# Altium PCB Lenovo_Scanner t32.PcbDoc
Units mm, origin at the board's own origin, x right, y up, seen from the top; angles counter-clockwise.
Board outline 49.92 x 50.5 mm, 2 copper layers (Top, Bottom); 11 components, 64 nets, 111 pads, 13 vias.
Unrouted connection lines stored in the file: 2.
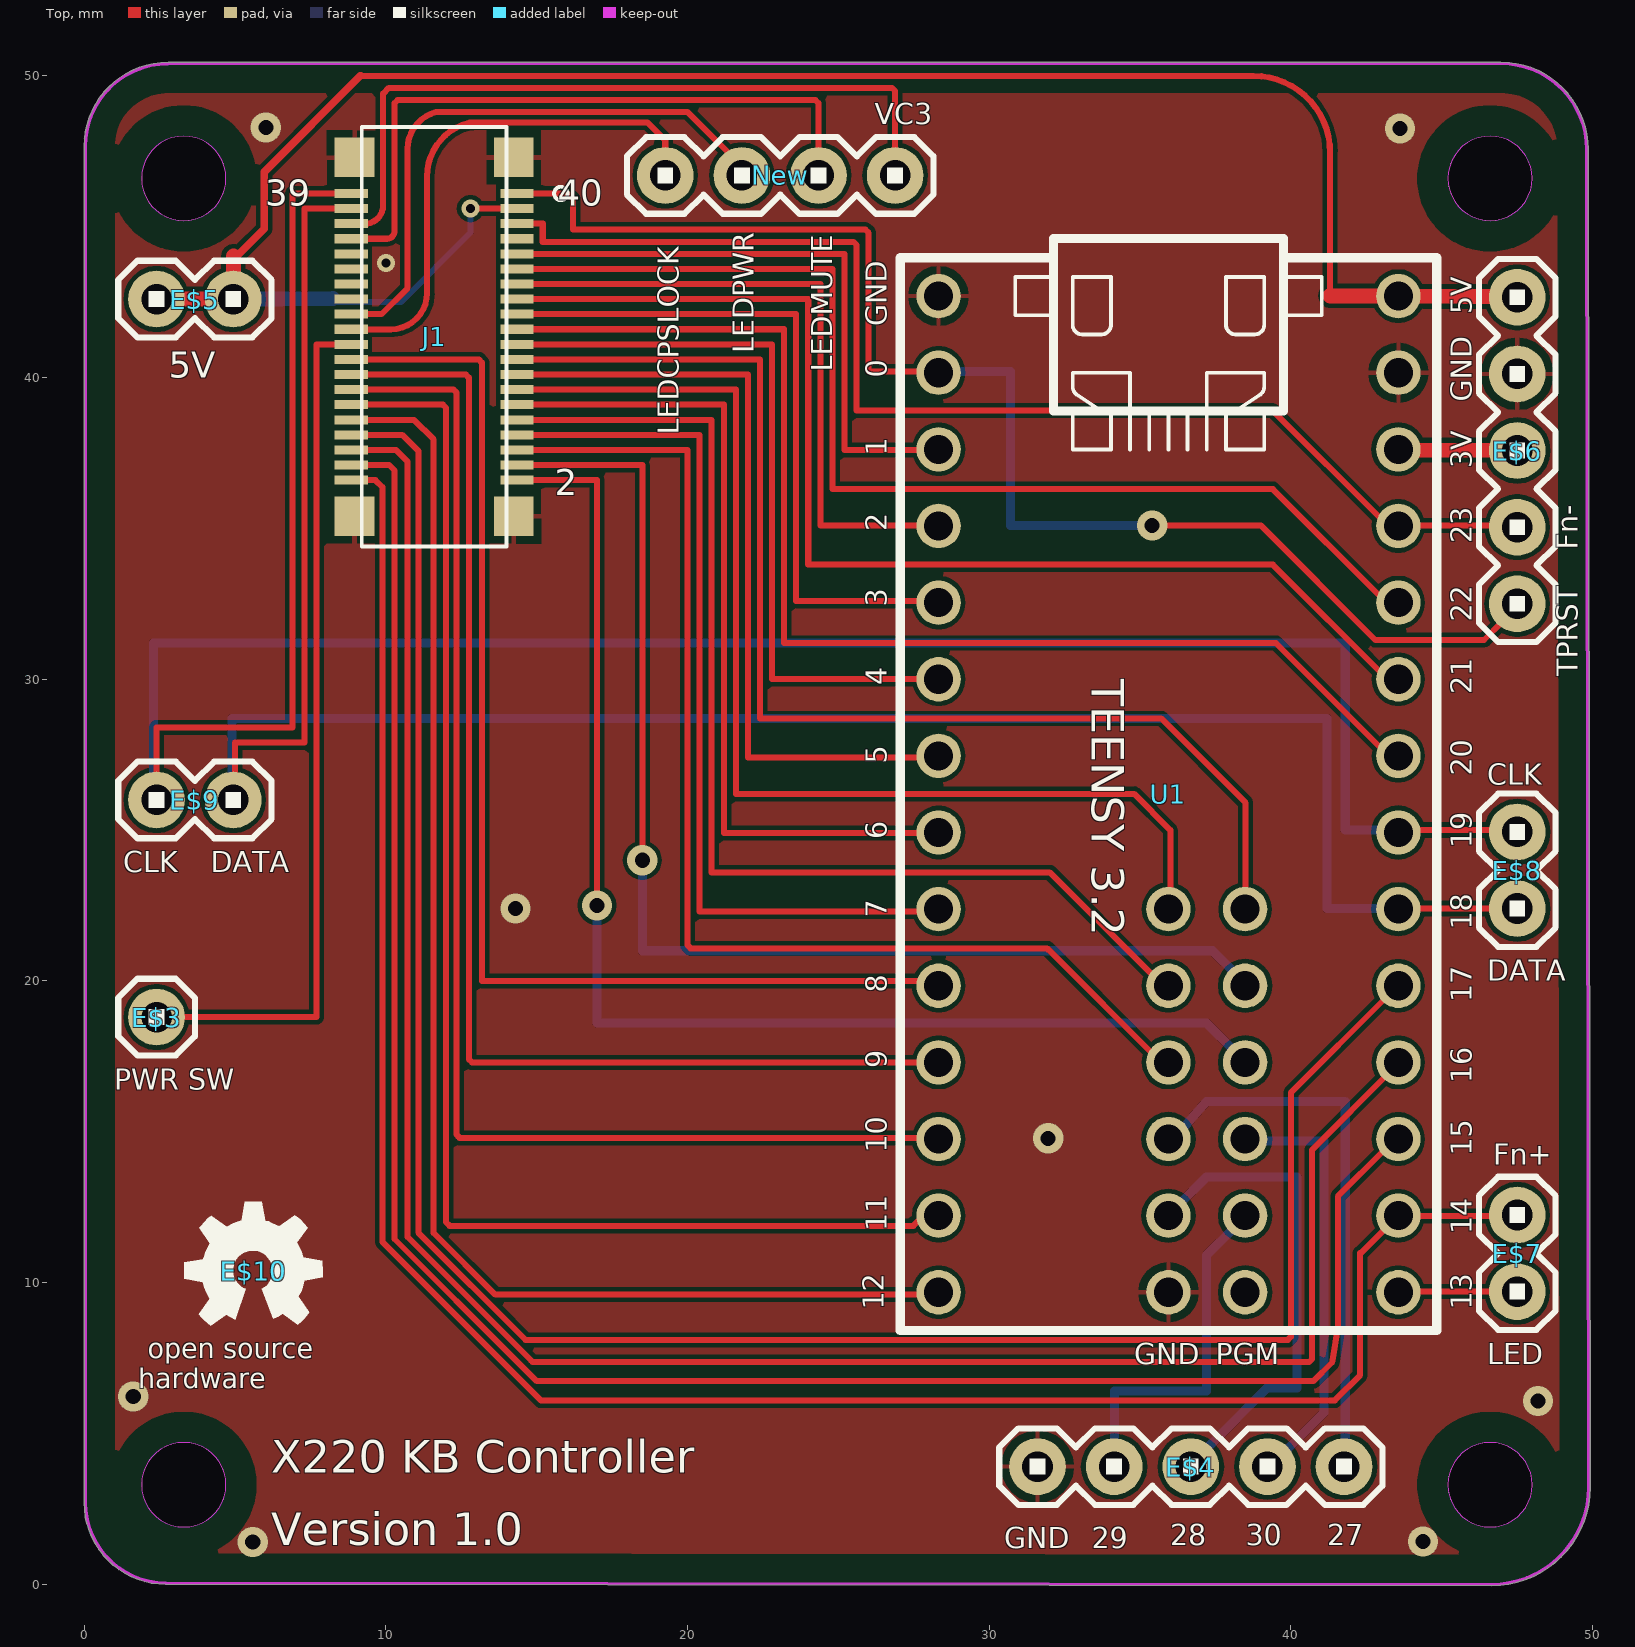
[diagram p0: Top view]
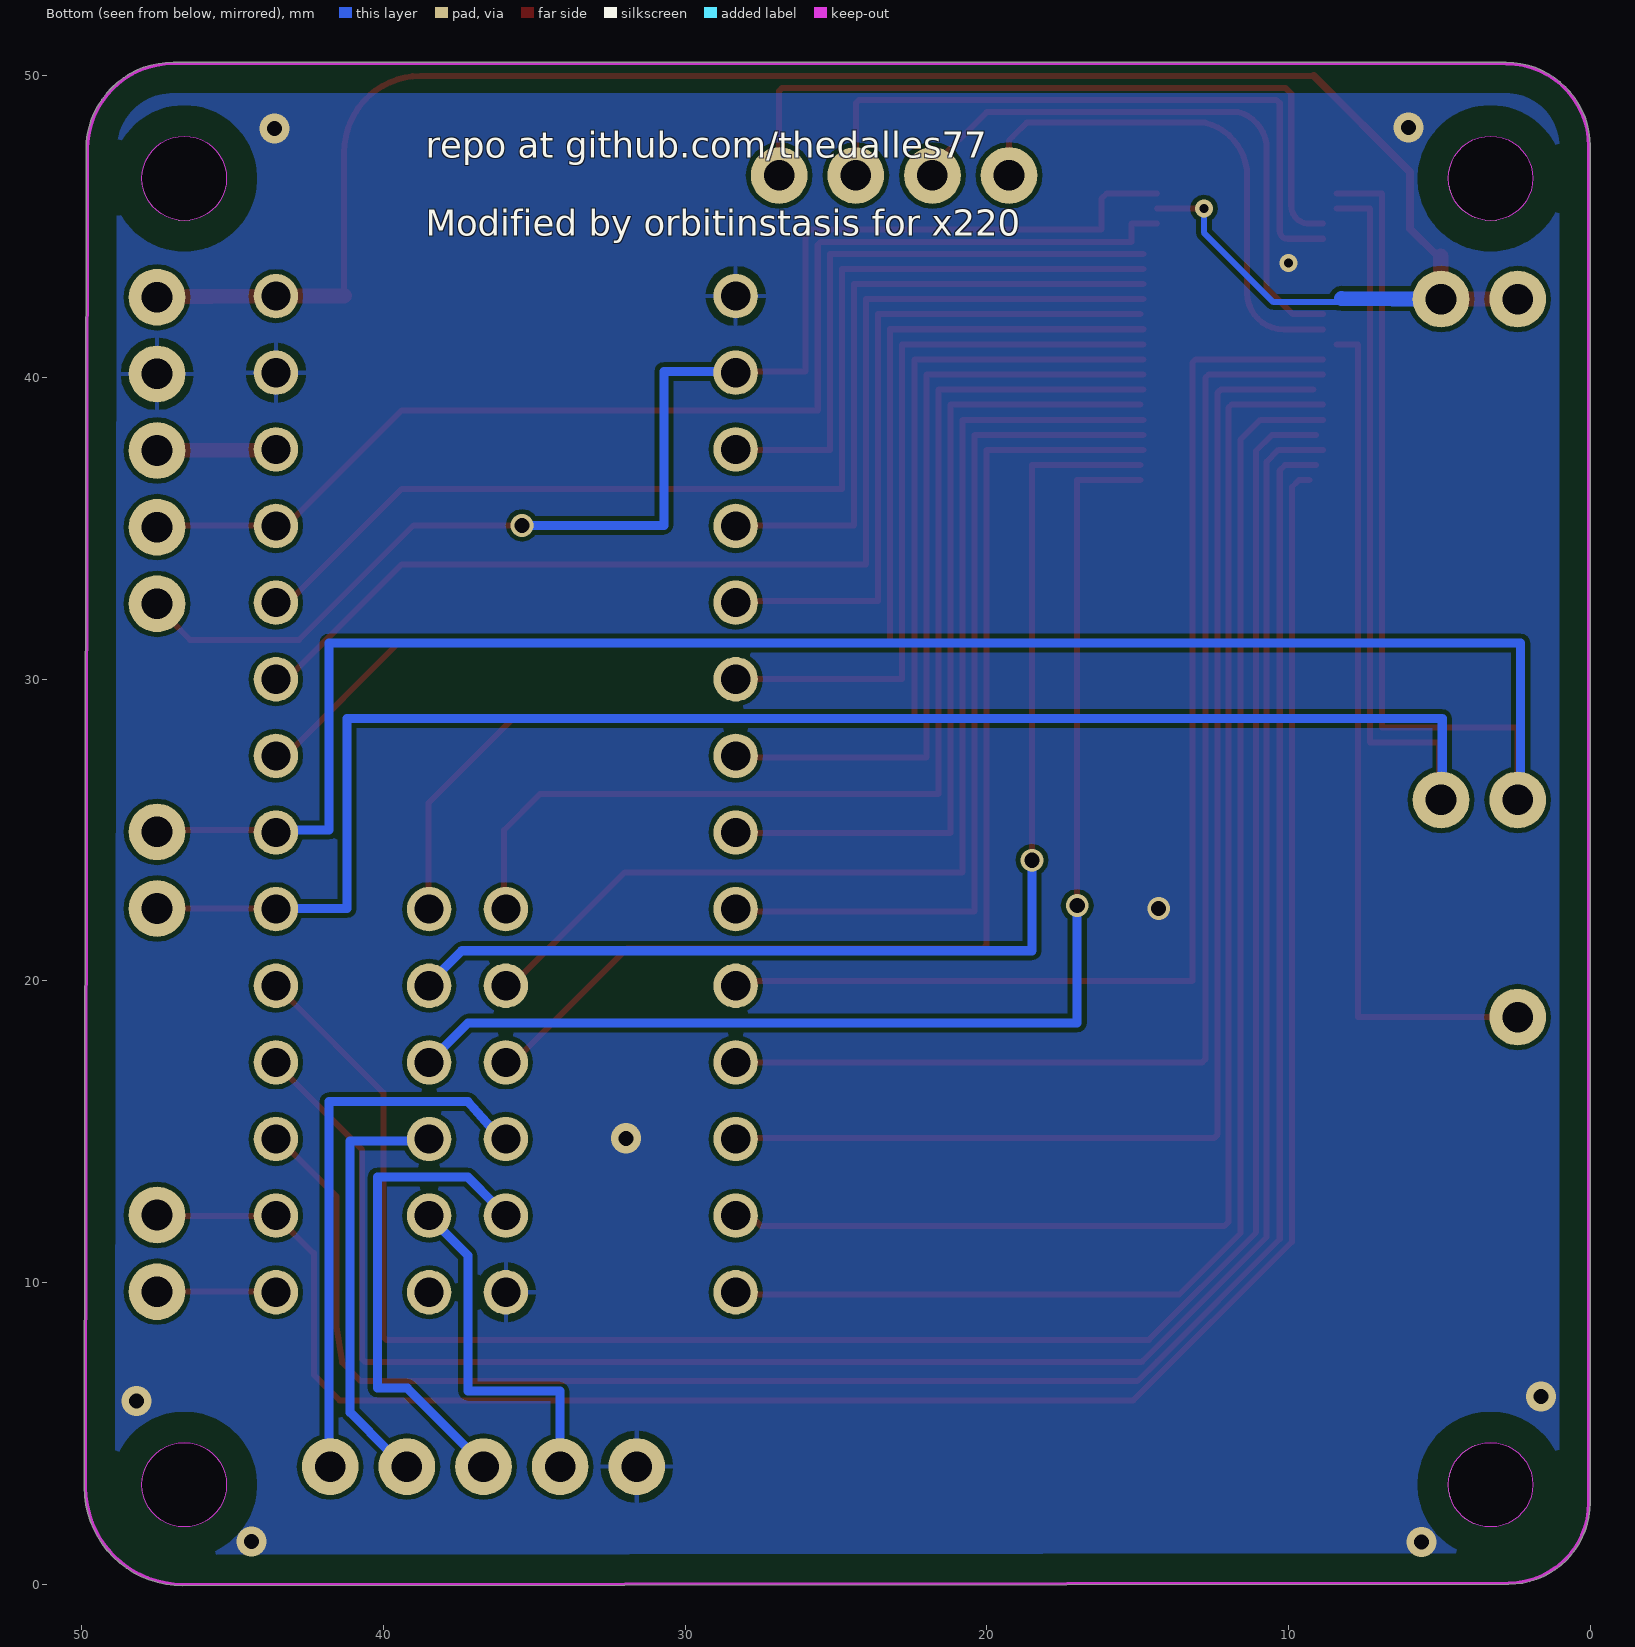
[diagram p1: Bottom view, seen from below]

## Layer stack, top to bottom
Top Solder: solder mask 0.0102, Solder Resist, Dk 3.5
Top: signal copper 0.035
Dielectric 1: dielectric 0.32, FR-4, Dk 4.8
Bottom: signal copper 0.035
Bottom Solder: solder mask 0.0102, Solder Resist, Dk 3.5

## Board outline
0,2.703 0,2.899 cw(c0.03,2.9) 0,2.9 0,47.409 0,47.666 cw(c2.781,47.666) 2.781,50.448 46.96,50.453 cw(c46.96,47.563) 49.85,47.563 49.916,3.22 cw(c49.865,3.22) 49.915,3.21 cw(c46.645,3.22) 46.645,-0.05 2.703,0 cw(c2.703,2.703)
cut-out: 3.3,1.9 ccw(c3.3,3.3) 4.7,3.3 ccw(c3.3,3.3) 3.3,4.7 ccw(c3.3,3.3) 1.9,3.3 ccw(c3.3,3.3)
cut-out: 3.3,45.2 ccw(c3.3,46.6) 4.7,46.6 ccw(c3.3,46.6) 3.3,48 ccw(c3.3,46.6) 1.9,46.6 ccw(c3.3,46.6)
cut-out: 46.6,1.9 ccw(c46.6,3.3) 48,3.3 ccw(c46.6,3.3) 46.6,4.7 ccw(c46.6,3.3) 45.2,3.3 ccw(c46.6,3.3)
cut-out: 46.6,45.2 ccw(c46.6,46.6) 48,46.6 ccw(c46.6,46.6) 46.6,48 ccw(c46.6,46.6) 45.2,46.6 ccw(c46.6,46.6)

## Design rules (kind name [scope] priority, off if disabled: settings)
BoardOutlineClearance mdCopperDimension [All] p1: gap=0.254 ignorepadtopadclearanceinfootprint=FALSE except(0: Arc-SplitContinuation Track-SplitContinuation SMDPad-SplitContinuation THPad-SplitContinuation Via-SplitContinuation Fill-SplitContinuation Poly-SplitContinuation Region-SplitContinuation Text-SplitContinuation; 1.016: Poly-OutlineEdge Poly-CavityEdge Poly-CutoutEdge Poly-SplitBarrior)
Clearance "Clearance (Same Net)" [All] p1: gap=0.152 ignorepadtopadclearanceinfootprint=FALSE
Clearance [All] p2: gap=0.152 ignorepadtopadclearanceinfootprint=FALSE
HoleSize [All] p1: absolutevalues=TRUE maxlimit=2540 minlimit=0.35 maxpercent=80.000 minpercent=20.000
HoleToHoleClearance mdDrill [All] p1: gap=0.152 allowstackedmicrovias=TRUE
MinimumSolderMaskSliver [All] p1 off: minsoldermaskwidth=0.254
PasteMaskExpansion mlMinCreamFrame [All] p1: expansion=0
PolygonConnect PolygonConnect_For_PolygonThermal_ON_Width60000_Gap100000 [InPolygonClass('PolygonThermal_ON_Width60000_Gap100000') vs Not IsVia] p1: connectstyle=Relief reliefconductorwidth=0.152 reliefentries=4 polygonreliefangle="90 Angle" airgapwidth=0.254
PolygonConnect ThermalVias [IsVia] p2: connectstyle=Direct reliefconductorwidth=0.254 reliefentries=4 polygonreliefangle="90 Angle" airgapwidth=0.254
PolygonConnect [All] p3: connectstyle=Relief reliefconductorwidth=0.254 reliefentries=4 polygonreliefangle="90 Angle" airgapwidth=0.254
RoutingVias [All] p1: holewidth=0.35 width=0.756 viastyle="Through Hole" minholewidth=0.35 minwidth=0.756 maxholewidth=2.54 maxwidth=2.54
ShortCircuit [All] p1 off: allowed=FALSE
SolderMaskExpansion mlMinStopFrame [All] p1: expansion=0.102 istentingtop=FALSE
Width [All] p1: maxlimit=0.254 minlimit=0.152 preferedwidth=0.152
25 further rules are at their usual default settings.

## Classes and differential pairs
polygon class PolygonThermal_ON_Width60000_Gap100000: Polygon_1_Net_S$1 Polygon_1_Net_S$69

## Components (designator, comment, footprint, x,y, rotation, side; value= is the part's Value field where it differs from the comment)
E$3 "" 1X01 2.4,18.8 r0 top
E$4 "" 1X05 31.6,3.9 r0 top
E$5 "" 1X02 2.4,42.6 r0 top
E$6 "" 1X05 47.5,32.5 r90 top
E$7 "" 1X02 47.5,9.7 r90 top
E$8 "" 1X02 47.5,22.4 r90 top
E$9 "" 1X02 2.4,26 r0 top
E$10 "" OSHW_5MM 5.6,10.4 r0 top
J1 "" WM6787CT-ND 11.313,40.637 r180 top (schematic designator P1)
New "Comment" 1X04 19.26,46.7 r0 top
U1 "" TEENSY_3P2MIN 33.4,30 r270 top (schematic designator P2)

## Footprints (in the part's own frame and the unit in brackets; to place one, negate y for a bottom-side part, rotate by r counter-clockwise, add the part's x,y. Pads: shape width x height; smd on the part's side, far side on the other; paste and mask are expansions set on the pad)
1X01 [mil] "1X01"
  round 74 hole 40: 1(0,0)
  silkscreen extent -50,-50 50,50
1X02 [mil] "1X02"
  round 74 hole 40: 1(0,0) 2(100,0)
  silkscreen extent -50,-50 150,50
1X04 [mil]
  round 74 hole 40: 1(0,0) 2(100,0) 3(200,0) 4(300,0)
  silkscreen extent -50,-50 350,50
1X05 [mil] "1X05"
  round 74 hole 40: 1(0,0) 2(100,0) 3(200,0) 4(300,0) 5(400,0)
  silkscreen extent -50,-50 450,50
OSHW_5MM [mm] "OSHW_5MM"
  silkscreen extent -2.29,-1.83 2.31,2.29
TEENSY_3P2MIN [mil] "TEENSY_3P2MIN"
  round 58 hole 38: 0(-400,-200) 1(-300,-200) 2(-200,-200) 3(-100,-200) 3V1(-300,400) 4(0,-200) 5(100,-200) 6(200,-200) 7(300,-200) 8(400,-200) 9(500,-200) 10(600,-200) 11(700,-200) 12(800,-200) 13(800,400) 14(700,400) 15(600,400) 16(500,400) 17(400,400) 18(300,400) 19(200,400) 20(100,400) 21(0,400) 22(-100,400) 23(-200,400) 24(300,100) 25(400,100) 26(500,100) 27(600,100) 28(700,100) 29(700,200) 30(600,200) 31(500,200) 32(400,200) 33(300,200) AGND(-400,400) GND1(-500,-200) GND2(800,100) PGM(800,200) VIN(-500,400)
  silkscreen extent -575,-250 850,450
WM6787CT-ND [mil] "WM6787CT-ND"
  rect 43.31x11.81 smd: P$1(-119.57,-215.06) P$2(96.96,-215.06) P$3(-119.57,-195.37) P$4(96.96,-195.37) P$5(-119.57,-175.69) P$6(96.96,-175.69) P$7(-119.57,-156) P$8(96.96,-156) P$9(-119.57,-136.32) P$10(96.96,-136.32) P$11(-119.57,-116.63) P$12(96.96,-116.63) P$13(-119.57,-96.95) P$14(96.96,-96.95) P$15(-119.57,-77.26) P$16(96.96,-77.26) P$17(-119.57,-57.58) P$18(96.96,-57.58) P$19(-119.57,-37.89) P$20(96.96,-37.89) P$21(-119.57,-18.21) P$22(96.96,-18.21) P$23(-119.57,1.48) P$24(96.96,1.48) P$25(-119.57,21.16) P$26(96.96,21.16) P$27(-119.57,40.85) P$28(96.96,40.85) P$29(-119.57,60.53) P$30(96.96,60.53) P$31(-119.57,80.22) P$32(96.96,80.22) P$33(-119.57,99.9) P$34(96.96,99.9) P$35(-119.57,119.59) P$36(96.96,119.59) P$37(-119.57,139.27) P$38(96.96,139.27) P$39(-119.57,158.96) P$40(96.96,158.96)
  rect 51.97x51.18 smd: P$41(-115.24,-262.3) P$42(92.63,-262.3) P$43(-115.24,206.2) P$44(92.63,206.2)
  silkscreen extent -185,-302 83,246, body extent -132,-301 104,246, height 61

## Part data
E$3: library part 1X01, PackageName=1X01
E$4 E$6: library part 1X05, PackageName=1X05
E$5 E$7 E$8 E$9: library part 1X02, PackageName=1X02
E$10: library part OSHW_5MM, PackageName=OSHW_5MM
J1: library part "Header 20X2", "Header, 20-Pin, Dual row", PackageName=WM6787CT-ND
U1: library part "Header 20X2", "Header, 20-Pin, Dual row", PackageName=TEENSY_3P2MIN

## Free pads (board coordinates)
  round 2.8 hole 2.8 unplated: MH1(46.6,46.6) MH2(3.3,46.6) MH3(3.3,3.3) MH4(46.6,3.3)

## Via types
v1: diameter 1, hole 0.5, Top to Bottom, tented both sides, 7 vias
v2: diameter 1/0.756 (per signal layer), hole 0.5, Top to Bottom, tented both sides, 3 vias
v3: diameter 0.6, hole 0.3, Top to Bottom, tented both sides, 2 vias
v4: diameter 1/0.756 (per signal layer), hole 0.5, Top to Bottom, 1 vias

## Nets (pads, with @x,y where several pads share a name; then routed paths per layer and width w, separated by ;. In a path a pad name is that pad's centre, name@x,y a point inside that pad or via, vN(x,y) a via of type N, cw(c..) or ccw(c..) an arc to the next point about the centre after c; other vN are vias at no path point)
S$1: 
S$2: 
S$3: 
S$4:  | length 35.4
  Top w0.2: 15.2,45.1 15.2,44.5 25.497,44.5 25.6,44.397 25.6,38.9 39.4,38.9 43,35.3
S$5:  | length 37
  Top w0.2: 14.8,43.6 24.8,43.6 24.8,36.3 39.4,36.3 43,32.7
S$6:  | length 19.5
  Top w0.2: 14.8,44.1 25.2,44.1 25.2,37.6 26.1,37.6 26.2,37.6 27.8,37.6
S$7:  | length 38.6
  Top w0.2: 14.8,42.6 24,42.6 24,33.8 39.4,33.8 43.1,30.1
S$8:  | length 22.4
  Top w0.2: 14.9,42.1 23.6,42.1 23.6,32.6 27.8,32.6
S$9:  | length 40.2
  Top w0.2: 14.8,41.6 23.2,41.6 23.2,31.2 39.5,31.2 43.1,27.6
S$10: E$4.1 E$6.4 J1.P$31 J1.P$34 J1.P$41 J1.P$42 J1.P$43 J1.P$44 U1.AGND U1.GND1 U1.GND2
  other v1: 5.588,1.397 44.374,1.422 48.184,6.071 1.626,6.223 31.953,14.783 43.612,48.26 6.02,48.285
  other v2: 14.3,22.4
  other v3: 10,43.8
S$11: 
S$12: 
S$13: 
S$14: 
S$15:  | length 11.7
  Bottom w0.3: 28.8,40.2 30.7,40.2 30.7,35.1 v4(35.4,35.1)
S$16:  | length 16.4
  Top w0.2: 14.9,37.1 18.5,37.1 18.5,24.3
S$17:  | length 16
  Top w0.2: 14.9,36.6 17,36.6 17,22.7
S$18:  | length 22.5
  Top w0.2: 5,26.5 5,27.9 7.3,27.9 7.3,45.6 8.4,45.6
S$19:  | length 25.6
  Top w0.2: 2.4,26.5 2.4,28.4 6.9,28.4 6.9,46.1 8.4,46.1
S$20:  | length 46.5
  Bottom w0.3: 4.9,26.6 4.9,28.7 41.2,28.7 41.2,22.4 43,22.4
S$21:  | length 51.5
  Bottom w0.3: 2.3,26.6 2.3,31.2 41.8,31.2 41.8,25 43,25
S$22: 
S$23: 
S$24:  | length 27.7
  Top w0.2: 3,18.8 7.7,18.8 7.7,41.1 8.4,41.1
S$25:  | length 64.7
  Top w0.2: 9.3,36.6 9.653,36.6 9.881,36.372 9.881,11.353 15.138,6.096 41.453,6.096 42.291,6.934 42.291,10.976
S$26:  | length 67.7
  Top w0.2: 9.093,37.1 10.108,37.1 10.287,36.921 10.287,11.445 14.335,7.398 15.001,6.731 40.742,6.731 41.362,7.351 41.371,7.407 41.557,8.539 41.557,12.857 43.1,14.4
S$27:  | length 70.1
  Top w0.2: 8.85,37.6 10.33,37.6 10.719,37.211 10.719,11.512 14.813,7.418 14.865,7.366 40.597,7.366 40.7,7.469 40.7,14.4 43.3,17
S$28:  | length 71.2
  Top w0.2: 9.093,38.1 10.541,38.1 11.074,37.567 11.074,11.655 14.626,8.103 39.897,8.103 40,8.206 40,16.3 43.2,19.5
S$29:  | length 24.1
  Top w0.2: 14.8,41.1 22.8,41.1 22.8,30 27.8,30
S$30:  | length 39.9
  Top w0.2: 14.8,40.6 22.4,40.6 22.4,28.7 35.7,28.7 38.5,25.9 38.5,22.8
S$31:  | length 43.8
  Top w0.2: 9.169,39.6 12.241,39.6 12.293,39.549 12.344,39.497 12.344,14.903 12.396,14.852 12.448,14.8 28.32,14.8
S$32:  | length 42.1
  Top w0.2: 8.85,40.1 12.648,40.1 12.751,39.997 12.751,17.403 12.854,17.3 28.32,17.3
S$33:  | length 40
  Top w0.2: 8.85,40.6 13.079,40.6 13.183,40.497 13.183,20.003 28.32,20.003
S$34:  | length 29.8
  Top w0.2: 8.85,39.1 11.886,39.1 11.992,38.994 11.992,12.416
S$35:  | length 46.4
  Top w0.2: 8.85,38.6 10.93,38.6 11.582,37.948 11.582,11.645 13.628,9.6 27.8,9.6
S$36:  | length 25.7
  Top w0.2: 14.8,40.1 22,40.1 22,27.4 27.8,27.4
S$37:  | length 16.4
  Top w0.2: 11.992,12.416 11.992,12.007 12.116,11.883 27.483,11.883 27.8,12.2
S$38:  | length 37.2
  Top w0.2: 14.8,39.6 21.6,39.6 21.6,26.2 34.8,26.2 36,25 36,22.9
S$39:  | length 27.1
  Top w0.2: 14.9,39.1 21.2,39.1 21.2,24.9 27.8,24.9
S$40:  | length 37.1
  Top w0.2: 14.8,38.6 20.8,38.6 20.8,23.6 32,23.6 35.5,20.1
S$41:  | length 28.8
  Top w0.2: 14.8,38.1 20.4,38.1 20.4,22.3 27.8,22.3
S$42:  | length 38.8
  Top w0.2: 14.8,37.6 20,37.6 20,21.185 20.052,21.134 20.103,21.082 31.918,21.082 31.97,21.03 35.644,17.356
S$43: 
  other v2: 18.5,24
S$44: 
  other v2: 17,22.5
S$45: 
S$46:  | length 16.2
  Top w0.2: 16.2,44.9 25.897,44.9 26,44.797 26,40.2 27.8,40.2
S$47:  | length 22.7
  Bottom w0.3: 18.5,23.7 18.5,21 37.4,21 38.2,20.2
S$48:  | length 25.1
  Bottom w0.3: 17,22.2 17,18.6 37.2,18.6 38.1,17.7
S$49: 
S$50:  | length 13.1
  Top w0.2: 35.7,35.1 39,35.1 42.8,31.3 46.4,31.3 47,31.9
S$53:  | length 17.3
  Bottom w0.3: 36.4,15.1 37.2,16 41.8,16 41.8,4.5
S$54:  | length 12.8
  Bottom w0.3: 39.1,14.7 41.1,14.7 41.1,5.7 39.8,4.4
S$55:  | length 15.1
  Bottom w0.3: 36.3,12.6 37.2,13.5 40.2,13.5 40.2,6.5 39.2,6.5 37.2,4.5
S$56:  | length 10.8
  Bottom w0.3: 34.15,4.4 34.15,6.4 37.2,6.4 37.2,10.9 38.1,11.8
S$57:  | length 2.4
  Top w0.2: 44.2,35.1 46.6,35.1
S$58:  | length 2.8
  Top w0.2: 44.1,12.2 46.9,12.2
S$59:  | length 2.8
  Top w0.2: 44.1,22.4 46.9,22.4
S$60:  | length 2.8
  Top w0.2: 44.1,25 46.9,25
S$61:  | length 2.8
  Top w0.2: 44.1,9.7 46.9,9.7
S$62:  | length 3.3
  Top w0.508: 44.2,37.6 47.5,37.58
S$63: 
S$64: 
S$69: 
S$70:  | length 21
  Top w0.2: 14.8,43.1 24.4,43.1 24.4,35.1 27.8,35.1
pads on no net: E$3.1 E$4.2 E$4.3 E$4.4 E$4.5 E$5.1 E$5.2 E$6.1 E$6.2 E$6.3 E$6.5 E$7.1 E$7.2 E$8.1 E$8.2 E$9.1 E$9.2 J1.P$1 J1.P$2 J1.P$3 J1.P$4 J1.P$5 J1.P$6 J1.P$7 J1.P$8 J1.P$9 J1.P$10 J1.P$11 J1.P$12 J1.P$13 J1.P$14 J1.P$15 J1.P$16 J1.P$17 J1.P$18 J1.P$19 J1.P$20 J1.P$21 J1.P$22 J1.P$23 J1.P$24 J1.P$25 J1.P$26 J1.P$27 J1.P$28 J1.P$29 J1.P$30 J1.P$32 J1.P$33 J1.P$35 J1.P$36 J1.P$37 J1.P$38 J1.P$39 J1.P$40 New.1 New.2 New.3 New.4 U1.0 U1.1 U1.2 U1.3 U1.3V1 U1.4 U1.5 U1.6 U1.7 U1.8 U1.9 U1.10 U1.11 U1.12 U1.13 U1.14 U1.15 U1.16 U1.17 U1.18 U1.19 U1.20 U1.21 U1.22 U1.23 U1.24 U1.25 U1.26 U1.27 U1.28 U1.29 U1.30 U1.31 U1.32 U1.33 U1.PGM U1.VIN
copper on no net: | length 158.9
  Top w0.2: 8.85,41.6 9.901,41.6 10.166,41.6 ccw(c10.166,42.799) 11.365,42.799 11.365,46.06 11.365,46.665 cw(c13.2,46.665) 12.743,48.442 cw(c12.786,48.271) 12.785,48.448 18.307,48.448 18.673,48.448 19.129,47.992 19.26,47.861 19.26,46.7 ; 8.85,42.1 9.856,42.1 10.719,42.963 10.719,43.573 10.719,46.05 10.719,47.574 cw(c11.986,47.574) 11.665,48.8 20,48.8 21.856,46.944 ; 8.85,44.6 10.03,44.6 ccw(c10.03,44.856) 10.287,44.856 10.287,49.097 10.39,49.2 24.237,49.2 24.34,49.097 24.34,46.456 ; 8.85,45.1 9.311,45.1 ccw(c9.311,45.695) 9.906,45.695 9.906,47.997 9.906,49.406 10.1,49.6 26.777,49.6 26.88,49.497 26.88,46.27 ; 9.157,50 32.98,50 38.76,50 cw(c38.76,47.46) 41.3,47.46 41.3,42.8 ; v3(12.8,45.6) 14.35,45.6 ; 14.35,45.1 14.6,45.1 15.2,45.1 ; 14.35,46.1 15.9,46.1 16.024,46.1 16.2,45.924 16.2,44.9 ; 42.316,10.976 43.56,12.22
  Top w0.254: 5.055,44.018 5.969,44.933 5.969,46.812 9.157,50
  Top w0.508: 2.4,42.616 4.94,42.6 4.949,44.019 ; 41.299,42.714 43.56,42.7 ; 44,42.7 47.3,42.68 ; 47.5,42.66 47.5,42.68
  Bottom w0.2: 6.4,42.5 10.5,42.5 12.8,44.8 v3(12.8,45.6)
  Bottom w0.508: 4.94,42.6 8.24,42.62

## Polygon pours and split planes (outlines as drawn)
S$10 on Top "Polygon_1_Net_S$1" (solid, remove dead copper, pour order 1): 0,49.952 49.952,49.952 49.952,0 0,0
S$10 on Bottom "Polygon_1_Net_S$69" (solid, remove dead copper, pour order 0): -0.076,-0.076 -0.076,49.876 49.876,49.876 49.876,-0.076

## Keep-outs
Keep-Out Layer:
  lines w0.1: 0.051,2.9 0.05,47.409 0.05,47.666 cw(c2.781,47.666) 2.781,50.398 46.96,50.403 cw(c46.96,47.563) 49.8,47.563 49.865,3.22 ; 0.051,3.009 0.051,2.703 ccw(c2.703,2.703) 2.703,0.051 46.645,0 ccw(c46.645,3.22) 49.864,3.22

## Silkscreen, mask and mechanical layers (free items; w line width, h text height)
Top Overlay:
  text "VC3" at 26.2,48.4 h0.69
  text "39" at 6,45.7 h0.86
  text "40" at 15.7,45.7 h0.86
  text "5V" at 46,42.1 h0.69 r90
  text "GND" at 26.6,41.7 h0.69 r90
  text "LEDPWR" at 22.2,40.8 h0.69 r90
  text "LEDMUTE" at 24.8,40.2 h0.69 r90
  text "5V" at 2.8,40 h0.86
  text "0" at 26.6,40 h0.69 r90
  text "GND" at 46,39.2 h0.69 r90
  text "LEDCPSLOCK" at 19.7,38.1 h0.69 r90
  text "1" at 26.6,37.4 h0.69 r90
  text "3V" at 46,37 h0.69 r90
  text "2" at 15.6,36.1 h0.86
  text "2" at 26.6,34.9 h0.69 r90
  text "23" at 46,34.5 h0.69 r90
  text "Fn-" at 49.5,34.3 h0.69 r90
  text "3" at 26.6,32.4 h0.69 r90
  text "22" at 46,31.9 h0.69 r90
  text "TPRST" at 49.5,30.1 h0.69 r90
  text "4" at 26.6,29.8 h0.69 r90
  text "21" at 46,29.5 h0.69 r90
  text "5" at 26.6,27.2 h0.69 r90
  text "20" at 46,26.8 h0.69 r90
  text "CLK" at 46.5,26.5 h0.69
  text "6" at 26.6,24.7 h0.69 r90
  text "19" at 46,24.4 h0.69 r90
  text "CLK" at 1.3,23.6 h0.69
  text "DATA" at 4.2,23.6 h0.69
  text "7" at 26.6,22.1 h0.69 r90
  text "18" at 46,21.7 h0.69 r90
  text "DATA" at 46.5,20 h0.69
  text "8" at 26.6,19.6 h0.69 r90
  text "17" at 46,19.3 h0.69 r90
  text "9" at 26.6,17.1 h0.69 r90
  text "16" at 46,16.6 h0.69 r90
  text "PWR SW" at 1,16.4 h0.69
  text "10" at 26.6,14.3 h0.69 r90
  text "15" at 46,14.2 h0.69 r90
  text "Fn+" at 46.7,13.9 h0.69
  text "11" at 26.6,11.7 h0.69 r90
  text "14" at 46,11.6 h0.69 r90
  text "12" at 26.5,9.1 h0.69 r90
  text "13" at 46,9.1 h0.69 r90
  text "GND" at 34.8,7.3 h0.69
  text "PGM" at 37.5,7.3 h0.69
  text "LED" at 46.5,7.3 h0.69
  text "X220 KB Controller" at 6.2,3.7 h1.08
  text "Version 1.0" at 6.2,1.3 h1.08
  text "28" at 36,1.3 h0.69
  text "30" at 38.5,1.3 h0.69
  text "27" at 41.2,1.3 h0.69
  text "GND" at 30.5,1.2 h0.69
  text "29" at 33.4,1.2 h0.69
Bottom Overlay:
  text "repo at github.com/thedalles77 /  / Modified by orbitinstasis for x220" at 38.6,44.7 h0.86
Dimension:
  lines w0.152: 0,0 49.8,0 49.8,49.8 0,49.8 0,0

## Text inside footprints (layer, text, board x,y; h text height)
E$10: Top Overlay "open source" at 2.1,7.5 h0.65; Top Overlay "hardware" at 1.8,6.5 h0.65
U1: Top Overlay "TEENSY 3.2" at 33.4,30 h1.08 r270